# Altium PCB linkit-v4-0.3_6layers_smdonly.PcbDoc (part 4 of 5)
Units mil, origin at the board's own origin, x right, y up, seen from the top; angles counter-clockwise.
Board outline 2755.93 x 1377.98 mil, 6 copper layers (Top Layer, Int1 (GND), Int2 (Sign), Int3 (Sign), Int4 (PWR), Bottom Layer), stack 64.425 mil thick; 199 components, 156 nets, 686 pads, 678 vias.
Unrouted connection lines stored in the file: 1.
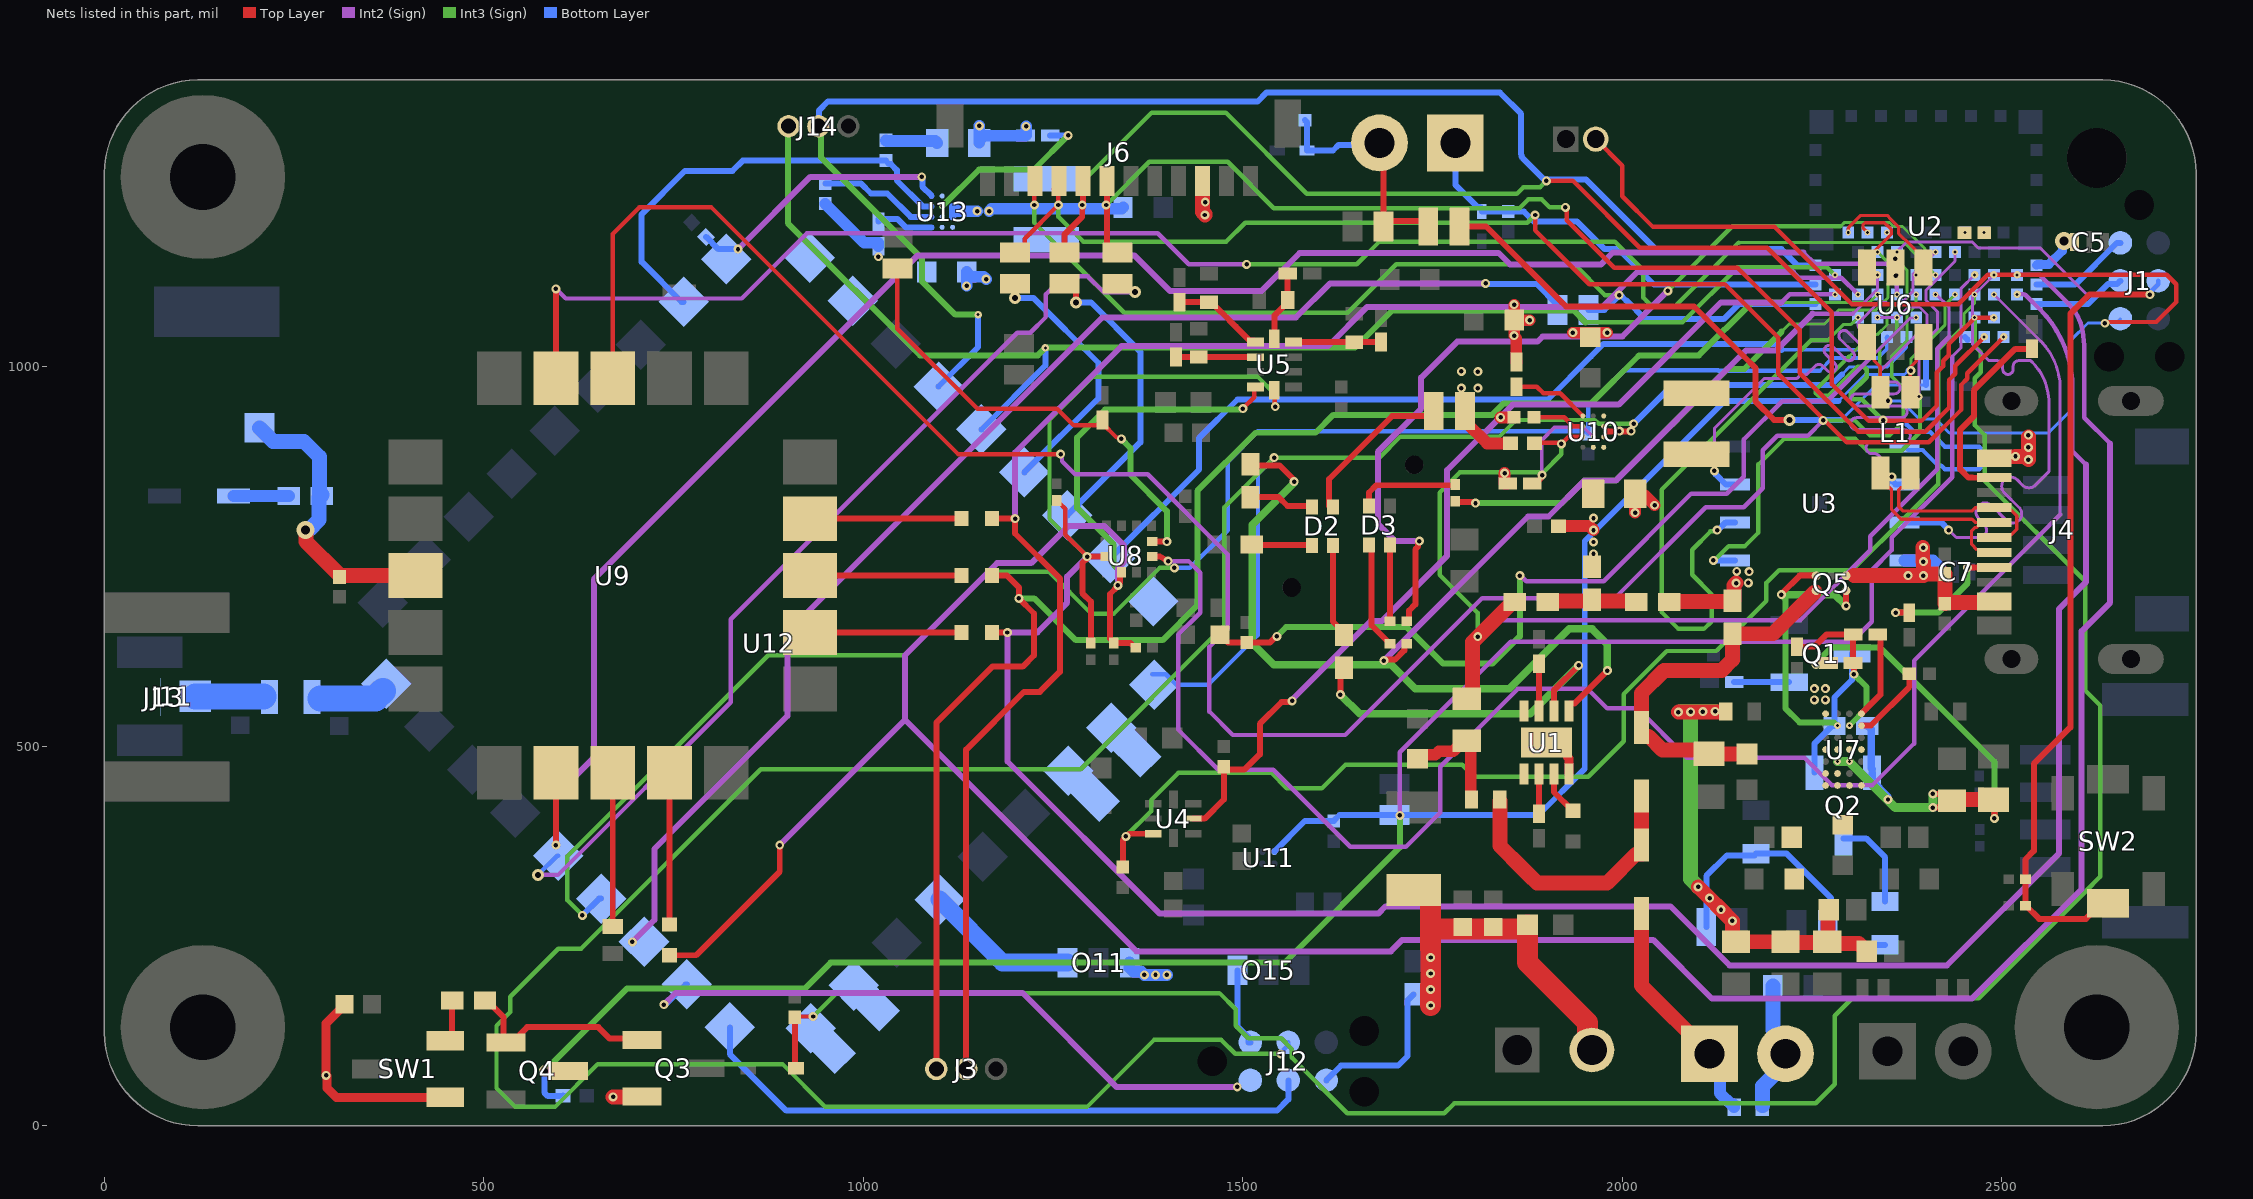
[diagram p7: the nets of this part, all layers, seen from the top]

## Via types
v1: diameter 11.81, hole 5.91, Int1 (GND) to Int3 (Sign), tented both sides, 151 vias
v2: diameter 11.81, hole 5.91, Top Layer to Int1 (GND), tented both sides, 100 vias
v3: diameter 11.81, hole 5.91, Top Layer to Int3 (Sign), tented both sides, 63 vias
v4: diameter 11.81, hole 5.91, Top Layer to Int4 (PWR), tented both sides, 61 vias
v5: diameter 11.81, hole 5.91, Int1 (GND) to Bottom Layer, tented both sides, 58 vias
v6: diameter 11.81, hole 5.91, Int1 (GND) to Int2 (Sign), tented both sides, 38 vias
v7: diameter 15.75/15.75/15.75/15.75 (per signal layer), hole 7.87, Top Layer to Bottom Layer, tented both sides, 28 vias
v8: diameter 11.81, hole 5.91, Top Layer to Int2 (Sign), tented both sides, 18 vias
v9: diameter 11.81, hole 5.91, Int3 (Sign) to Bottom Layer, tented both sides, 17 vias
v10: diameter 11.81, hole 5.91, Int2 (Sign) to Int3 (Sign), tented both sides, 16 vias
v11: diameter 11.81, hole 5.91, Int2 (Sign) to Bottom Layer, tented both sides, 15 vias
v12: diameter 7.87, hole 3.94, Int3 (Sign) to Bottom Layer, tented both sides, 14 vias
v13: diameter 23.62, hole 5.91, Int1 (GND) to Bottom Layer, tented both sides, 13 vias
v14: diameter 19.68, hole 7.87, Top Layer to Bottom Layer, tented both sides, 12 vias
v15: diameter 7.87, hole 3.94, Int2 (Sign) to Bottom Layer, tented both sides, 11 vias
v16: diameter 11.81, hole 5.91, Int4 (PWR) to Bottom Layer, tented both sides, 9 vias
v17: diameter 15.75, hole 7.87, Top Layer to Bottom Layer, tented both sides, 7 vias
v18: diameter 8.9, hole 3.94, Top Layer to Int3 (Sign), tented both sides, 6 vias
v19: diameter 9.84, hole 3.94, Int3 (Sign) to Bottom Layer, tented both sides, 5 vias
v20: diameter 9.84, hole 3.94, Int2 (Sign) to Bottom Layer, tented both sides, 5 vias
v21: diameter 9.84, hole 3.94, Top Layer to Bottom Layer, tented both sides, 5 vias
v22: diameter 11.81, hole 5.91, Bottom Layer to Int4 (PWR), tented both sides, 4 vias
v23: diameter 7.87, hole 3.94, Top Layer to Bottom Layer, tented both sides, 3 vias
v24: diameter 23.62, hole 11.81, Top Layer to Bottom Layer, tented both sides, 3 vias
v25: diameter 23.62, hole 5.91, Top Layer to Int2 (Sign), tented both sides, 2 vias
v26: diameter 23.62, hole 5.91, Int3 (Sign) to Bottom Layer, tented both sides, 2 vias
v27: diameter 11.81, hole 5.91, Top Layer to Bottom Layer, tented both sides, 2 vias
v28: diameter 9.84, hole 3.94, Int1 (GND) to Bottom Layer, tented both sides, 2 vias
v29: diameter 7.87, hole 3.94, Int1 (GND) to Bottom Layer, tented both sides, 2 vias
v30: diameter 15.75, hole 7.87, Int2 (Sign) to Bottom Layer, tented both sides, 1 vias
v31: diameter 15.75, hole 7.87, Top Layer to Int2 (Sign), tented both sides, 1 vias
v32: diameter 6.65, hole 3.94, Int3 (Sign) to Bottom Layer, tented both sides, 1 vias
v33: diameter 23.62, hole 5.91, Bottom Layer to Int4 (PWR), tented both sides, 1 vias
v34: diameter 9.84, hole 3.94, Int2 (Sign) to Int3 (Sign), tented both sides, 1 vias
v35: diameter 6.65, hole 3.94, Top Layer to Int2 (Sign), tented both sides, 1 vias

## Nets (pads, with @x,y where several pads share a name; then routed paths per layer and width w, separated by ;. In a path a pad name is that pad's centre, name@x,y a point inside that pad or via, vN(x,y) a via of type N, cw(c..) or ccw(c..) an arc to the next point about the centre after c; other vN are vias at no path point) (continued)
GPS_INT: U2.61 U9.19 | length 2105.4
  Top Layer w7.87: U9.19@595.2,984.84 v8(595.2,1102.77)
  Int2 (Sign) w5.91: v8(595.2,1102.77) 607.97,1090 840,1090 925.83,1175.83 1387.8,1175.83 1428.63,1135 v10(1505,1135)
  Int3 (Sign) w3.94: 2153.17,1163.72 2371.28,1163.72 2387.2,1147.8 v12(2387.2,1121.01)
  Int3 (Sign) w5.91: v10(1505,1135) 1650,1135 1680,1165 1917.56,1165 1990,1165 2027.81,1127.19 2027.81,1090.85 2034.98,1083.68 2039.49,1079.17 2068.63,1079.17 2111.54,1122.09 2153.17,1163.72
GPS_NRST: U2.53 U9.18 | length 2757.1
  Top Layer w5.75: U9.18@670,984.84 670,1175 705,1210 800,1210 1125,885 v8(1260,885)
  Int2 (Sign) w5.75: v8(1260,885) 1261.91,883.09 1261.91,875.58 1279.14,858.35 1374.79,858.35 1480,753.14 1480,655 1456.04,631.04 1456.04,545.76 1486.88,514.92 1634.92,514.92 1815.35,695.35 1990.35,695.35 2110,815 2160,815 2185,840 2185,890 2204.25,909.25 2244.45,909.25 v10(2264.52,929.32)
  Int3 (Sign) w3.94: 2375.28,1034.23 2375.28,1069.58 2387.2,1081.5 v12(2387.2,1095.42)
  Int3 (Sign) w4.72: v10(2264.52,929.32) 2281.33,929.32 2306.51,929.32 2326.89,908.94 2351.34,908.94 2370.4,928.01 2370.4,971.8 2355,987.2 2355,1013.95 2375.28,1034.23
GPS_PPS: U2.54 U9.7 | length 2450.9
  Top Layer w7.87: v8(595,370) 595,464.96 U9.7@595.2,465.16
  Int2 (Sign) w5.91: 2238.51,1150.72 2253.55,1135.68 2348.24,1135.68 2361.61,1122.31 v15(2361.61,1095.42)
  Int2 (Sign) w7.87: v8(595,370) 595,435 645,485 645,720 1071.85,1146.85 1357.08,1146.85 1403.93,1100 1525,1100 1575,1150 1837.03,1150 1852.03,1135 1917.56,1135 1972.03,1135 1987.75,1150.72 2238.51,1150.72
GPS_PWR_EN: R21.2 U2.50 U4.7 | length 1700.2
  Top Layer w7.87: R21.2@1341.69,341.02 1341.94,341.27 1341.94,376.26 1346.02,380.34 v3(1346.02,381.4) 1347.09,381.4 1350.56,384.87 1381.73,384.87 U4.7@1381.85,385
  Int3 (Sign) w3.94: 2415.92,1020.76 2450.2,1055.04 2450.2,1069.87 2463.98,1083.65 v12(2463.98,1095.42)
  Int3 (Sign) w5.91: v3(1346.02,381.4) 1379.16,414.54 1379.16,429.16 1415,465 1538.11,465 1558.11,445 1604.34,445 1635.32,475.98 1789.02,475.98 1805,460 1955,460 2001.8,506.8 2001.8,568.89 2058.54,625.63 2123.69,625.63 2189.92,691.85 2189.92,715.48 2206.67,732.24 2302.9,732.24 2375.83,805.16 2415.92,845.26 2415.92,1013.57 2415.92,1020.76
GPS_UART_RX: J3.2 R40.2 U2.56 | length 2151.3
  Top Layer w7.87: J3.2@1135.63,75 1135.63,495.63 1211.76,571.76 1232.66,571.76 1258.96,598.06 1258.96,721.38 1200,780.34 v8(1200,800) R40.2@1169.82,800
  Int2 (Sign) w5.91: 2225,1125 2232.59,1117.41 2288.45,1117.41 v15(2310.43,1095.42)
  Int2 (Sign) w7.87: v8(1200,800) 1200,887.11 1340.22,1027.33 1612.33,1027.33 1663.97,1078.97 1917.56,1078.97 1973.97,1078.97 2020,1125 2225,1125
GPS_UART_TX: J3.3 R42.2 U2.55 | length 2192
  Top Layer w7.87: J3.3@1096.26,75 1096.26,531.26 1170,605 1210,605 1225,620 1225,675 v3(1205,695) 1205,709.51 1189.51,725 R42.2@1169.82,725
  Int3 (Sign) w3.94: 2210,1084.6 2325.2,1084.6 v12(2336.02,1095.42)
  Int3 (Sign) w7.87: v3(1205,695) 1225.1,695 1280.17,639.93 1394.35,639.93 1440.15,685.73 1440.15,836.6 1516.7,913.14 1595.85,913.14 1619.41,936.7 1828.67,936.7 1843.78,951.81 1958.84,951.81 2020.6,1013.57 2022.03,1015 2100.92,1015 2170.52,1084.6 2210,1084.6
I2C_SCL: R1.1 R43.2 R54.1 U2.29 U5.10 U8.12 | length 3516.7
  Top Layer w5.91: R54.1@1255,823.98 1255,823.19 1258.35,819.84 1259.13,819.84 1266.04,812.94 1266.04,778.96 v3(1295,750) ; U8.12@1319.41,750.08 U8.12@1319.49,750.16 ; U5.10@1541.69,969.21 1542.24,968.66 1542.24,948.16 v3(1542.79,947.61)
  Top Layer w7.87: R43.2@1169.82,650.19 1169.92,650.1 1189.9,650.1 v8(1190,650) ; v3(1295,750) 1295,747.87 1288.72,741.59 1288.72,701.9 1300,690.62 R1.1@1300,636.02 ; v3@1295.08,750.08 U8.12@1319.41,750.08
  Int2 (Sign) w5.91: v20(2520.08,1095.42) 2527.95,1095.42 cw(c2527.95,1089.52) 2532.13,1093.69 2550.92,1074.9 ; 2550.94,1074.88 cw(c2448.87,973.52) 2591.77,990 cw(c2448.87,973.52) 2592.72,973.55 2592.72,973.49 2592.72,889.09 2610.75,871.05
  Int2 (Sign) w7.87: v3(1295,750) 1268.64,723.64 1268.64,689.35 1229.29,650 v8(1190,650) 1190,480 1390,280 1678.89,280 1687.89,289 2063.75,289 2141.47,211.29 2427.59,211.29 2575.43,359.12 2575.43,681.04 2610.75,716.37 2610.75,871.05
  Int3 (Sign) w5.91: v3(1295,750) 1245.38,799.62 1245.38,930.38 1302.17,987.17 1519.37,987.17 1542.19,964.35 1542.19,948.22 v3(1542.79,947.61)
I2C_SDA: R2.1 R44.1 R56.1 U2.27 U5.9 U8.2 | length 4253
  Top Layer w5.91: v3(1500,945) 1515,960 1515,970.59 1516.58,972.16 U5.9@1516.58,973.54
  Top Layer w7.87: R44.1@744.8,224.82 779.82,224.82 890,335 v8(890,370) ; R2.1@1330,636.02 1330,636.81 1325.04,641.77 1325.04,658.86 1325.04,700.77 1335.32,711.05 1335.32,713.18 1338.19,716.05 1338.19,727.52 U8.2@1340.16,729.49 ; R2.1@1330.23,636.25 1351.94,636.25 1358.19,630 R56.1@1358.98,630
  Int2 (Sign) w5.91: v20(2520.08,1121.01) 2550,1121.01 2586.96,1084.05 cw(c2536.63,1033.73) 2607.81,1033.73 cw(c2508.62,1020.97) 2608.59,1023.31 cw(c2602.69,1023.2) 2608.6,1023.2 2608.6,1014.98 2608.62,990 2608.62,933.08 2642.64,899.06
  Int2 (Sign) w7.87: v8(890,370) 1055,535 ; v3(1335.32,712.11) 1335.32,734.36 1343.85,742.9 1343.85,764.08 1317.93,790 1270,790 1221.25,741.25 1176.25,741.25 1055,620 1055,535 ; 2642.64,899.06 2642.64,689.32 2605,651.68 2605,497.04 2605,312.03 2460.53,167.56 2118.12,167.56 2040.68,245 1710,245 1695,230 1360,230 1055,535
  Int3 (Sign) w7.87: v3(1335.32,712.11) 1335.32,733.99 1330,739.31 1330,766.18 1281.88,814.3 1281.88,906.88 1318.72,943.72 1498.72,943.72 v3(1500,945)
IMU_PWR: R18.2 R31.1 U2.41 | length 1220.7
  Top Layer w7.87: R31.1@1470,647.28 1480.67,636.61 1511.62,636.61 1535.55,636.61 1543.93,645 v3(1545,645)
  Int2 (Sign) w3.94: 2328.71,1013.57 2379.67,1064.53 2386.83,1064.53 v15(2387.2,1064.91)
  Int2 (Sign) w5.91: v10(1865,725) 1865.86,725 1873.38,717.48 1975.36,717.48 2090.55,832.67 2137.67,832.67 2160,855 2160,904.33 2210.51,954.84 2269.98,954.84 2328.71,1013.57
  Int3 (Sign) w7.87: v3(1545,645) 1556.97,656.97 1716.06,656.97 1764.01,609.01 1829.01,609.01 1865,645 v10(1865,725)
INT1_IMU: U2.49 U8.5 | length 2224.1
  Top Layer w7.87: U8.5@1380.51,750.16 1390.61,750.16 v8(1401.53,744.14)
  Int2 (Sign) w3.94: v15(2489.57,1095.42) 2551.05,1033.94 cw(c2488.98,971.8) 2574.9,990 cw(c2488.98,971.8) 2576.81,971.82 2576.81,971.75 2576.81,805.44
  Int2 (Sign) w5.91: v8(1401.53,744.14) 1428.49,744.14 1444.01,728.62 1444.01,676.15 1414.72,646.85 1414.72,522.17 1467.8,469.09 1540.21,469.09 1641.54,367.76 1715,367.76 1760,412.76 1760,473.34 1862.24,575.58 1954.3,575.58 1979.89,550 2020,550 2085,485 2240,485 2276.02,448.98 2329.53,448.98 2384.28,503.73 2384.28,612.92 2576.81,805.44
INT2_IMU: O10.2 R63.1 U8.6 | length 624.1
  Top Layer w5.91: O10.2@1045,1129.5 1045,1050 1150,945 1255,945 1277.29,922.71 1310.08,922.71 1315,927.63 R63.1@1315,930 1315,925.57 1333.69,906.88 1338.12,906.88 v3(1340,905)
  Top Layer w7.87: U8.6@1380.51,769.84 v3(1400,769.84)
  Int3 (Sign) w7.87: v3(1340,905) 1352.04,892.96 1352.04,857.83 1400,809.87 v3(1400,769.84)
KIM_PWR_ON: U2.36 | length 5.4
  Bottom Layer w7.87: U2.36@2451.18,1039.32 U2.36@2455,1035.5
LED_B: R24.1 U2.63 | length 914.5
  Top Layer w7.87: v8(1685.83,612.96) 1687.34,614.46 1700.74,614.46 1712.87,626.59 1712.87,632.64 1715.24,635 R24.1@1716.02,635
  Int2 (Sign) w3.94: 2303.78,1070 2336.02,1102.25 v20(2336.02,1121.01)
  Int2 (Sign) w5.91: 2250.79,1070 2303.78,1070
  Int2 (Sign) w7.87: v8(1685.83,612.96) 1875.68,802.81 1902.81,802.81 1950,850 1991.34,850 2154.92,1013.57 2163.12,1021.78 2202.57,1021.78 2250.79,1070
LED_G: R25.1 U2.60 | length 1195.6
  Top Layer w7.87: R25.1@1716.02,665 1716.81,665 1719.17,667.36 1719.17,678.9 1727.32,687.05 1727.32,759.58 1731.07,763.33 1731.07,768.76 v8(1732.58,770.27)
  Int2 (Sign) w7.87: v8(1732.58,770.27) 1700.92,770.27 1678.02,793.16 1678.02,888.02 1735,945 1735,985.66 1782.53,1033.19 1888.19,1033.19 1895,1040 1917.56,1040 2000,1040 v10(2060,1100)
  Int3 (Sign) w3.94: 2287.37,1185 2292.32,1189.95 2352.69,1189.95 2357.64,1185 2369.1,1185 2398.66,1155.44 2398.66,1135.15 v12(2412.79,1121.01)
  Int3 (Sign) w5.91: v10(2060,1100) 2145,1185 2287.37,1185
LED_R: R23.1 U2.62 | length 717.8
  Top Layer w7.87: R23.1@1780,822.95 1781.2,821.75 1805.38,821.75 v3(1806.58,820.55)
  Int3 (Sign) w3.94: 2210,1046.41 2219.84,1056.26 2266.26,1056.26 2285,1075 2334,1075 2350.07,1091.08 2350.07,1109.47 v12(2361.61,1121.01)
  Int3 (Sign) w7.87: v3(1806.58,820.55) 1920.55,820.55 1950.34,850.34 1991.73,850.34 2138.79,997.4 2160.98,997.4 2210,1046.41
"LX1_TPS63901 3V3&2V31": L2.1 U10.A1
"LX1_TPS63901 3V3&2V32": L4.1 U13.A1
"LX2_TPS63901 3V3&2V31": L2.2 U10.D1
"LX2_TPS63901 3V3&2V32": L4.2 U13.D1
NetBT1_+: BT1.+ C40.2 R41.1 U9.3 | length 381.3
  Top Layer w19.68: v24(265,785) 265.75,784.25 265.75,769.98 C40.2@310,725.74 ; C40.2@312.01,725 U9.3@410.16,725
  Bottom Layer w19.68: BT1.+@204.54,919.68 222.32,901.9 263.1,901.9 283.51,881.49 283.51,831.65 283.72,831.44 R41.1@286.84,831.44 ; v24(265,785) 265.75,785.75 270.37,785.75 283.12,798.5 283.12,827.72 285.09,829.68 R41.1@286.58,829.68
NetC2_2: C2.2 R53.1 U1.8 | length 157.1
  Top Layer w15.75: R53.1@1855.39,690 R53.1@1858.35,690
  Top Layer w19.68: C2.2@1795,562.56 1797.94,562.56 1802.86,567.48 1802.86,637.47 R53.1@1855.39,690
NetC5_2: C5.2 U2.26 | length 55.7
  Bottom Layer w11.81: U2.26@2545.67,1133.81 2546.67,1134.81 2561.85,1134.81 2579.88,1152.84 2579.88,1163.23 v24(2582.14,1165.49)
NetC7_2: C7.2 U3.8 | length 56.9
  Bottom Layer w15.75: U3.8@2371.81,745 2409.12,745 2418.35,735.78 2418.35,731.97 C7.2@2420.32,730
NetC14_1: C14.1 R27.2 U5.4 | length 115
  Top Layer w7.87: U5.4@1566.81,1032.6 C14.1@1646.81,1032.6 R27.2@1681.81,1032.6
NetC15_1: C15.1 R30.2 U5.5 | length 97.4
  Top Layer w7.87: U5.5@1541.69,1036.93 1541.69,1067.44 1559.21,1084.96 C15.1@1559.21,1087.91 1559.21,1118.97 1556.65,1118.97 R30.2@1560.59,1122.91
NetC16_1: C16.1 R32.2 U5.6 | length 121.5
  Top Layer w7.87: R32.2@1416.81,1085.15 C16.1@1455.39,1085.15 1458.35,1085.15 1472.25,1071.24 1472.55,1071.24 1490.87,1052.92 1509.19,1034.57 1514.61,1034.57 U5.6@1516.58,1032.6
NetC23_1: C23.1 C24.2 C25.1 C28.2 C29.1 C32.2 C33.2 C43.2 U7.B3 U7.B4 | length 651.9
  Top Layer w15.75: v3(2122.25,546.14) 2135.91,546.14 C25.1@2136.3,545.75
  Top Layer w19.68: v3(2073.87,545.07) 2133.35,545.07 C25.1@2134.38,546.11 ; v3(2100,315) v3(2115,300) v3(2130,285) v3(2145,270) 2145,253.82 2146.34,252.48 2146.34,242.48 2146.42,242.56 C43.2@2150,242.56 C24.2@2215,242.56 C24.2@2218.74,242.56 ; C24.2@2219.67,241.63 C28.2@2255.93,241.63 ; C28.2@2270.95,242.56 2270.95,280.64 2271.89,281.59 C32.2@2271.89,285 ; C28.2@2273.27,240.42 2311.47,240.42 2317.56,234.33 2318.15,234.33 2321.89,230.59 C33.2@2321.89,230
  Int3 (Sign) w19.68: v3@2077.64,546.14 v3@2090.71,546.14 ; v3(2100,315) 2090,325 v3(2090,545.43) v3@2090.71,546.14 ; v3(2122.25,546.14) v3@2090.71,546.14
  other v3: 2106.13,545.78
NetC30_1: C30.1 C31.1 R36.1 U7.C2 U7.C3 | length 707.5
  Top Layer w7.87: v3(2254.96,607.51) 2255.72,608.27 2269.8,608.27 R36.1@2271.54,610 ; v3(2409.26,419.39) 2425.06,419.39 C31.1@2435.43,429.77 ; v3(2409.26,437.48) 2425.36,437.48 C31.1@2434.25,428.59 ; v3(2490,405) C30.1@2490,429.02
  Top Layer w19.68: C31.1@2435.43,429.77 C30.1@2489.25,429.77 C30.1@2490,429.02
  Int3 (Sign) w7.87: v3(2254.96,607.51) 2254.96,608.58 2256.93,610.55 2256.93,611.93 2275,630 2340,630 2490,480 v3(2490,405)
  Int3 (Sign) w11.81: v18(2283.5,480) v18(2299.25,480) 2359.86,419.39 v3(2409.26,419.39) v3(2409.26,437.48)
NetC49_2: C49.2 J11.3 J13.1 L3.2 | length 89.4
  Bottom Layer w34.26: J11.3@120.55,565.51 L3.2@210,565.51
NetC57_1: C57.1 R51.2 U5.7 | length 110.1
  Top Layer w7.87: R51.2@1411.97,1012.91 C57.1@1441.97,1012.91 U5.7@1516.58,1012.91 U5.7@1516.5,1012.99 ; C57.1@1441.97,1016.81 C57.1@1445.79,1012.99
NetC58_1: C58.1 D5.1 D6.1 U1.1 | length 357.6
  Top Layer w19.68: C58.1@1838.7,428.03 1838.7,369.06 1868.57,339.19 1868.57,338.99 1882.41,325.15 1882.61,325.15 1887.76,320 1980,320 2018.46,358.46 2025,358.46 2025,365 D6.1@2025,434.45
NetD2_1: D2.1 O9.2 | length 216
  Top Layer w7.87: D2.1@1618.78,815.59 1617.88,816.49 1613.78,816.49 1613.78,852.24 1696.54,935 1744.89,935 O9.2@1751.63,941.73
NetD2_2: D2.2 R13.1 | length 86.5
  Top Layer w7.87: R13.1@1510,828.35 1547.16,828.35 1558.9,816.61 1590.2,816.61 D2.2@1591.22,815.59
NetD2_3: D2.3 R14.2 | length 80.2
  Top Layer w7.87: R14.2@1511.65,766.02 1512.24,765.43 1590.2,765.43 D2.3@1591.22,764.41
NetD2_4: D2.4 R15.1 | length 123.9
  Top Layer w7.87: D2.4@1618.78,764.41 1618.78,664.37 1633.54,649.61 R15.1@1633.54,646.65
NetD3_2: D3.2 R23.2 | length 136
  Top Layer w7.87: D3.2@1666.22,816.61 1666.22,834.48 1675.72,843.98 1778.98,843.98 R23.2@1780,845
NetD3_3: D3.3 R24.2 | length 142.4
  Top Layer w7.87: D3.3@1666.22,765.43 1669.64,762.01 1669.64,659.33 1690.83,638.15 1690.83,637.36 1693.19,635 R24.2@1693.98,635
NetD3_4: D3.4 R25.2 | length 100.2
  Top Layer w7.87: R25.2@1693.98,665 D3.4@1693.98,765.24
NetD4_1: D4.1 R41.2 | length 73.1
  Bottom Layer w15.75: D4.1@170.2,829.68 R41.2@243.27,829.68
NetJ4_A5: J4.A5 R34.2 | length 184.8
  Top Layer w7.87: v3(2360,676.22) R34.2@2377.99,676.22 ; v3(2455,735.87) J4.A5@2489.88,735.87
  Int3 (Sign) w7.87: v3(2360,676.22) 2416.22,676.22 2455,715 v3(2455,735.87)
NetJ4_B5: J4.B5 R33.2 | length 260.6
  Top Layer w7.56: 2461.31,853.98 J4.B5@2473.15,853.98
  Top Layer w7.87: 2461.31,853.98 2456.02,853.98 2445,865 2445,916.95 2463.15,935.1 2463.15,969.08 2517.85,1023.78 R33.2@2540,1023.78 ; J4.B5@2473.15,853.98 J4.B5@2489.88,853.98
NetJ12_1: J12.1 O15.1 | length 103.5
  Bottom Layer w7.87: O15.1@1493,205 1493,131.61 1507.5,117.11 1507.5,110 J12.1@1510,110
NetJ12_6: J12.6 R65.2 | length 204.9
  Bottom Layer w7.87: J12.6@1610,60 1629.43,79.43 1704.43,79.43 1717.13,92.13 1717.13,165.47 R65.2@1725,173.35
NetO11_1: O11.1 U12.30 | length 202.8
  Bottom Layer w23.62: U12.30@1100.58,298.1 1183.67,215 O11.1@1269,215
NetQ1_1: Q1.1 R3.1 | length 72.4
  Bottom Layer w7.87: R3.1@2147.4,584.49 Q1.1@2219.84,584.49
NetQ1_3: Q1.3 Q2.1 R4.2 | length 178.8
  Bottom Layer w7.87: Q2.1@2253.39,465.39 2253.39,503.9 2276.57,527.09 R4.2@2279.53,527.09 2279.53,564.53 2302.52,587.52 Q1.3@2302.52,622.09
NetQ2_3: Q2.3 R5.1 | length 123.5
  Bottom Layer w7.87: Q2.3@2291.18,378.78 2321.22,378.78 2346.18,353.82 R5.1@2346.18,295.63
NetQ3_1: Q3.1 Q4.1 R49.1 | length 265.9
  Top Layer w7.87: R49.1@501.65,165 504.61,165 526.39,143.21 526.39,112.61 Q4.1@529.17,109.84 537.34,109.84 556.79,129.29 556.79,130 651.06,130 666.06,115 701.06,115 Q3.1@708.66,107.4
NetQ5_A2: Q5.A2 Q5.C1 U7.F3 | length 397.9
  Top Layer w7.87: v3(2209.68,699.87) 2209.68,700.96 2233.56,724.84 Q5.C1@2255.32,724.84 ; v3(2294.69,685) Q5.A2@2294.69,705.16
  Int3 (Sign) w7.87: v3(2209.68,699.87) 2209.68,698.8 2214.8,693.68 2214.8,550.2 2233.6,531.4 2279.07,531.4 2283.23,527.24 v18(2283.5,527.24)
  Int3 (Sign) w10: v3(2209.68,699.87) 2279.82,699.87 v3(2294.69,685)
NetR10_2: R10.2 U1.3 | length 59.2
  Top Layer w7.87: U1.3@1909.84,463.66 1909.84,439.84 1934.51,415.18 R10.2@1935,415.18
NetR11_2: R11.2 U1.2 | length 52.4
  Top Layer w7.87: R11.2@1890.16,411.22 U1.2@1890.16,463.66
NetR12_2: R12.2 U1.7 | length 62.5
  Top Layer w7.87: R12.2@1890,608.78 1890.08,608.7 1890.08,546.42 U1.7@1890.16,546.34
NetR17_1: R17.1 U2.20
  other v21: 2451.18,1177.12
NetR17_2: R17.2 U2.22
  other v21: 2476.77,1177.12
NetR36_2: R36.2 R38.1 R39.1 U7.F2 | length 217.3
  Top Layer w7.87: R39.1@2230,631.22 2252.87,631.22 2268.89,647.24 R38.1@2304.13,647.24 R36.2@2304.13,610.16 ; R36.2@2303.98,610 2305,608.98 v3(2305,595)
  Int3 (Sign) w7.87: v18(2299.25,527.24) 2299.25,527.52 2321.7,549.97 2321.7,578.3 v3(2305,595)
NetR37_1: R37.1 U7.F1 | length 101.8
  Top Layer w7.87: U7.F1@2315,527.24 2315.2,527.44 2327.44,527.44 2377.99,577.99 R37.1@2377.99,595.75
NetR38_2: R38.2 U7.G1 | length 116
  Top Layer w7.87: U7.G1@2315,542.99 2340,567.99 2340,643.82 R38.2@2336.57,647.24
NetR40_1: R40.1 U9.14 | length 199.7
  Top Layer w7.87: U9.14@929.84,799.8 930.04,800 R40.1@1129.47,800
NetR42_1: R42.1 U9.13 | length 199.6
  Top Layer w7.87: U9.13@929.84,725 R42.1@1129.47,725
NetR43_1: R43.1 U9.12 | length 199.6
  Top Layer w7.87: U9.12@929.84,650.2 R43.1@1129.47,650.19
NetR44_2: R44.2 U9.9 | length 200
  Top Layer w7.87: R44.2@744.8,265.18 U9.9@744.8,465.16
NetR45_1: R45.1 U10.B2 | length 145
  Top Layer w7.87: R45.1@1881.37,846.38 1885.8,846.38 1893.65,854.22 1893.65,856.71 v8(1894.4,857.46)
  Int2 (Sign) w3.94: 1949.31,920.19 v35(1961.73,907.76)
  Int2 (Sign) w4.72: v8(1894.4,857.46) 1894.09,857.77 1894.09,903.65 1910.63,920.19 1949.31,920.19
NetR46_1: R46.1 U10.C3 | length 68.8
  Top Layer w5.91: R46.1@1883.86,933.42 1923.51,933.42 1935.51,921.41 U10.C3@1947.67,921.41
NetR47_2: R47.2 U10.D3 | length 103.1
  Top Layer w5.91: R47.2@1860.87,973.91 1887.31,973.91 1896.14,965.08 1903.95,965.08 1904.03,965 1918.27,965 U10.D3@1947.95,935.32
NetR49_2: R49.2 SW1.2 | length 56.5
  Top Layer w7.87: SW1.2@449.21,112.4 449.49,112.4 458.35,121.26 R49.2@458.35,165
NetR52_1: R52.1 R53.2 R55.1 | length 119.5
  Top Layer w15.75: R53.2@1901.65,690 R53.2@1903.33,691.67 ; R55.1@1958.33,691.67 R55.1@1960,693.35 R55.1@1961.67,691.67 ; R52.1@2016.67,691.67 R52.1@2018.35,690
  Top Layer w19.68: R53.2@1903.33,691.67 R55.1@1958.33,691.67 ; R55.1@1961.67,691.67 R52.1@2016.67,691.67
NetR68_1: R68.1 U13.B2 | length 228.6
  Int3 (Sign) w7.87: v32(1103.99,1211.36) 1152.63,1260 1225,1260 v9(1270,1305)
  Bottom Layer w7.87: R68.1@1246.22,1305 v9(1270,1305)
NetR69_1: R69.1 U13.C3 | length 158.5
  Bottom Layer w7.87: R69.1@950,1241.77 996.84,1241.77 1010.22,1228.39 1031.61,1228.39 1062.42,1197.58 U13.C3@1090.21,1197.58
NetR70_2: R70.2 U13.D3 | length 78.6
  Bottom Layer w7.87: R70.2@1020,1191.22 1020,1195 1045.01,1195 1056.22,1183.8 U13.D3@1090.21,1183.8
NPG_LED: R15.2 U1.6 | length 461.8
  Top Layer w7.87: v3(1628.52,568.27) 1628.52,598.33 R15.2@1633.54,603.35 ; U1.6@1909.84,546.34 1909.84,574.04 v3(1942.38,606.58)
  Int3 (Sign) w10: v3(1628.52,568.27) 1654.06,542.74 1878.54,542.74 v3(1942.38,606.58)
nRESET: C6.2 J1.3 R16.1 SW2.2 U2.13 | length 1433.8
  Top Layer w7.87: C6.2@2531.02,290 R16.1@2531.02,325 2531.02,351.02 2542.24,362.24 2542.24,477.24 2590.12,525.12 2590.12,1069.97 2615.15,1095 v27(2695,1095) ; C6.2@2531.81,290 2549.07,272.74 2610.57,272.74 2631.14,293.31 SW2.2@2640,293.31
  Int2 (Sign) w3.94: v15(2361.61,1151.53) 2374.36,1164.27 2461.34,1164.27 2469.01,1156.61 2550.63,1156.61 2612.24,1095 v27(2695,1095)
  Bottom Layer w5.91: v27(2695,1095) 2695,1097.66 2706.14,1108.8 J1.3@2706.14,1113.24
nRESET-SAT: J12.3 U2.42 U12.35 | length 3999
  Int3 (Sign) w5.77: v9(1550,95) 1490.02,95 1471.72,113.3 1383.11,113.3 1294.81,25 950,25 893.57,81.43 650.38,81.43 593.95,25 541.47,25 516.93,49.55 516.93,131.93 535,150 535,170 598.3,233.3 628.3,233.3 865,470 1286.43,470 1475.69,659.27 1475.69,814.81 v9(1541.19,880.31) 1680.13,880.31 1707.91,908.09 1838.09,908.09 1860,930 1963.92,930 1968.92,925 v9(2015,925)
  Bottom Layer w3.94: 2289.34,990 2299.3,999.96 2349.18,999.96 2374.41,1025.18 U2.42@2374.41,1039.32
  Bottom Layer w5.77: U12.35@1380.83,595.06 1398.63,595.06 1412.75,580.94 1413.2,581.39 1454.79,581.39 1520,646.6 1520,859.12 v9(1541.19,880.31) ; v9(1550,95) 1550,96.64 1560,106.64 J12.3@1560,110
  Bottom Layer w7.87: v9(2015,925) 2066.26,976.26 2275.61,976.26 2289.34,990
NRF_DBG: J1.6 J2.2 U2.43 | length 1593.2
  Top Layer w5.75: J2.2@1965,1300 2000,1265 2000,1224.8 2040.46,1184.34 2200.66,1184.34 2302.57,1082.43 2442.43,1082.43 2481.31,1121.31 2717.29,1121.31 2729.71,1108.89 2729.71,1085.32 2703.43,1059.04 2637.32,1059.04 v27(2635.7,1057.42)
  Int3 (Sign) w4.72: v9(2350,955) 2339.05,965.95 2339.05,1023.71 2361.61,1046.27 v12(2361.61,1064.91)
  Bottom Layer w3.94: v9(2350,955) 2366.63,955 2375.13,946.5 2375.88,946.5 2390.89,931.5 2412.12,931.5 2430.81,912.81 2561.06,912.81 2590,941.75 2590,1034.46 2613.4,1057.86 2635.26,1057.86 v27(2635.7,1057.42) 2637.96,1059.68 2652.57,1059.68 J1.6@2656.14,1063.24
PGND1: C41.2 C42.2 C48.2 C50.2 FB3.1 FB4.1 R45.2 R46.2 R47.1 R68.2 R69.2 R70.1 U10.B1 U10.C1 U13.B1 U13.C1 | length 739.5
  Top Layer w3.94: U10.B1@1975.51,907.76 1981.91,914.16 ; U10.C1@1975.51,921.54 1976.98,921.54 1981.91,916.6
  Top Layer w7.87: 1981.91,915.07 v2@2011.7,915.07
  Top Layer w15.15: FB4.1@1857.44,1057.87 1857.44,1041.07 1860.57,1037.94 1860.57,1006.65 R47.1@1860.87,1006.35 ; FB4.1@1857.44,1065.34 v2(1857.44,1081.99) ; FB4.1@1861.18,1061.61 v2(1877.82,1061.61) ; v2(1935,1045) v2(1980,1045)
  Top Layer w15.75: v2(1839.7,933.42) R46.2@1857.09,933.42 ; v2(1845,860) 1845,846.38 R45.2@1848.93,846.38 ; v2(2016.92,807.78) C41.2@2016.92,832.79 2018.31,831.4 2028.84,831.4 v2(2042.59,817.64)
  Bottom Layer w9.09: U13.C1@1117.77,1197.58 1117.77,1201.37 ; U13.B1@1117.77,1211.36 1120.8,1208.33
  Bottom Layer w10.12: 1117.77,1201.37 1120.8,1204.4
  Bottom Layer w15.15: R69.2@950,1215 950,1214.61 1001.1,1163.51 1019.7,1163.51 1020,1163.21 R70.1@1020,1158.78 ; 1120.8,1204.4 1120.8,1208.33 1124.13,1205 v5(1150,1205) ; v5(1136.14,1106.67) 1136.14,1124.57 C50.2@1136.57,1125 1136.57,1124.02 1141.8,1118.79 1158.6,1118.79 v5(1161.98,1115.41) ; C48.2@1152.56,1295 1153.06,1295.5 v5(1153.06,1317.47) ; C48.2@1152.56,1297.51 1159.75,1304.7 1213.48,1304.7 R68.2@1213.78,1305 1214.19,1305.01 1214.48,1305.3 v5(1214.48,1316.61) ; v5(1165.75,1205) 1168.87,1208.12 1340.32,1208.12 FB3.1@1342.2,1210
  other v2: 1996.13,915.18 2011.7,915.18 1857.44,1041.23
  other v5: 1020,1145
PGND3: FB2.1 U7.A1 U7.A2 U7.A3 U7.A4
PGND4: C2.1 C58.2 FB6.1 U1.4 U1.9 | length 216.6
  Top Layer w11.81: U1.9@1900,505 1913.78,505 1927.56,491.22 1927.56,486.27 1929.53,484.3 U1.4@1929.53,463.66
  Top Layer w15.15: FB6.1@1730,483.43 1735.22,488.65 1753.65,488.65 1758.4,493.4 1777.22,493.4 1791.26,507.44 C2.1@1795,507.44 1800.02,502.42 1800.02,431.28 C58.2@1801.3,430
POWER_CONTROL: D1.2 R58.2 U2.35 | length 2881.2
  Top Layer w5.91: R58.2@910,143.23 910.89,144.11 v3(934.11,144.11)
  Top Layer w7.87: R58.2@910,142.83 910,77.48 D1.2@911.5,75.98 D1.2@913.66,75.98
  Int3 (Sign) w5.91: v3(934.11,144.11) 965,175 1469.23,175 1490.67,153.56 1490.67,132.02 1507.38,115.3 1550.58,115.3 1564.76,101.12 1564.76,89.7 1637.83,16.63 1765.52,16.63 1778.89,30 2255,30 2280,55 2280,145.2 2302.97,168.17 2469.36,168.17 2609.76,308.57 2629.63,328.44 2629.63,553.72 2609.76,573.59 2609.76,717.36 2477.19,849.93 2477.19,910.21 2464.13,923.26 2464.13,984.76 2472.38,993.01 2472.38,1019.43 2463.98,1027.84 v12(2463.98,1064.91)
QSPI_CLK: U2.45 U3.6 | length 693.5
  Int2 (Sign) w3.94: v15(2336.02,1064.91) 2363.12,1064.91 2376.99,1078.78 2391.43,1078.78 2401.25,1068.96 2401.25,1055.96 2358.87,1013.57 2340,994.7 2340,990 2340,988.03 ccw(c2347.87,988.03) 2347.87,980.16 2358.19,980.16 cw(c2358.19,972.28) 2358.19,964.41 2308.5,964.41 ccw(c2308.5,956.54) 2308.5,948.66 2367.28,948.66 cw(c2367.28,940.79) 2367.28,932.91 2308.5,932.91 ccw(c2308.5,925.04) 2308.5,917.16 2371.5,917.16 cw(c2371.5,909.29) 2371.5,901.42 2329.05,901.42 ccw(c2329.05,893.54) 2329.05,885.67 2332.13,885.67 cw(c2332.13,877.8) 2340,877.8 2340,870 2345.2,864.8 v11(2355,855)
  Bottom Layer w7.87: v11(2355,855) 2356.06,853.94 2356.06,848.94 2360,845 U3.6@2371.81,845
QSPI_CS: U2.19 U3.1 | length 706.7
  Int2 (Sign) w3.94: v34(2390.64,960.82) 2390.64,1025.43 2415.2,1049.98 2415.2,1072.71 2399.77,1088.13 2399.77,1100.5 2438.39,1139.11 v15(2438.39,1151.53)
  Int3 (Sign) w5.91: v11(2120,745) 2121.33,745 2140.17,763.84 2161.51,763.84 2179.37,781.69 2179.37,871.43 2212.94,905 2307.06,905 2322.91,889.14 2367.28,889.14 2392.15,914.01 2392.15,959.31 v34(2390.64,960.82)
  Bottom Layer w7.87: v11(2120,745) U3.1@2148.19,745
QSPI_IO0: U2.11 U3.5 | length 743.8
  Int3 (Sign) w3.94: 2298.57,1013.57 2327.37,1042.37 2335.71,1042.37 2348.55,1055.21 2348.55,1072.41 2357.45,1081.31 2366.2,1081.31 2374.8,1089.91 2374.8,1127.47 2363.03,1139.23 2348.31,1139.23 v12(2336.02,1151.53)
  Int3 (Sign) w5.91: 2298.57,1013.57 2255.11,970.11 2255.11,965.22 2258.57,961.76 2271.76,961.76 2310,1000 2317.9,1000 2321.87,996.02 2321.87,986.38 2301.14,965.65 2301.14,960.75 2304.6,957.29 2315.45,957.29 v9@2343.05,929.69
  Bottom Layer w5.91: v9(2343.47,929.69) 2368.92,929.69 2383.93,914.68 2405.15,914.68 2424.84,895 2470,895 2478.86,886.14 2478.86,873.86 2470,865 2425,865 2420,870 2415.9,870 2395.49,890.41 2376.4,890.41 U3.5@2371.81,895
QSPI_IO1: U2.47 U3.2 | length 769.4
  Int3 (Sign) w3.94: 2270.6,1035 2291.58,1055.99 2301.51,1055.99 v12(2310.43,1064.91)
  Int3 (Sign) w5.91: v11(2125,785) 2123.12,783.12 2116.09,783.12 2092,759.03 2092,725.89 2117.86,700.02 2117.86,664.96 2107.52,654.62 2073.99,654.62 2051.67,676.93 2051.67,838.08 2227.16,1013.57 2248.59,1035 2270.6,1035
  Bottom Layer w7.87: v11(2125,785) 2126.38,785 2136.38,795 U3.2@2148.19,795
QSPI_IO2: U2.17 U3.3 | length 656.7
  Int2 (Sign) w3.94: v11(2121.42,862.87) 2121.42,919.12 2186.75,984.45 2229.63,984.45 2235.18,990 2243.02,990 2254.15,1001.14 cw(c2259.02,996.26) 2263.9,1001.14 2270.16,994.87 ccw(c2275.03,999.74) 2279.9,994.87 ccw(c2275.03,999.74) 2279.9,1004.62 2267.86,1016.66 cw(c2272.73,1021.53) 2267.86,1026.4 cw(c2272.73,1021.53) 2277.6,1026.4 2294.06,1009.94 ccw(c2298.94,1014.81) 2303.81,1009.94 ccw(c2298.94,1014.81) 2303.81,1019.69 2287.35,1036.15 cw(c2292.22,1041.02) 2287.35,1045.89 cw(c2292.22,1041.02) 2297.09,1045.89 2313.55,1029.43 ccw(c2318.42,1034.3) 2323.29,1029.43 ccw(c2318.42,1034.3) 2323.29,1039.17 2312.61,1049.85 cw(c2317.49,1054.73) 2312.61,1059.6 2337.61,1084.6 ; 2334.89,1081.87 2334.89,1082.29 2337.19,1084.6 2337.61,1084.6 ; v15(2412.79,1151.53) 2382.73,1121.46 2382.73,1099.32 2365.76,1082.35 2350.42,1082.35 2348.18,1084.6 2337.61,1084.6
  Bottom Layer w7.87: v11(2121.42,862.87) 2122.92,861.37 2122.92,858.45 2136.38,845 U3.3@2148.19,845
QSPI_IO3: U2.57 U3.7 | length 729.6
  Int2 (Sign) w3.94: v11(2430,785) 2440,775 2475,775 2476.39,776.39 ccw(c2467.93,784.86) 2476.39,793.32 2469.42,800.29 cw(c2477.88,808.75) 2469.42,817.22 cw(c2477.88,808.75) 2486.35,817.22 2505.79,797.77 ccw(c2514.25,806.24) 2522.71,797.77 ccw(c2514.25,806.24) 2522.71,814.7 2503.27,834.14 cw(c2511.74,842.6) 2503.27,851.07 cw(c2511.74,842.6) 2520.2,851.07 2527.17,844.1 ccw(c2535.63,852.56) 2544.1,844.1 2561.89,861.89 2561.89,956.76 ccw(c2487.11,953.2) 2552.3,990 ccw(c2487.11,953.2) 2543.52,1002.42 2537.92,1008.02 2523.79,1008.02 2521.82,1008.02 ccw(c2521.82,1001.13) 2514.93,1001.13 2514.93,996.89 cw(c2508.04,996.89) 2508.04,990 cw(c2508.04,996.89) 2501.15,996.89 2501.15,1001.13 ccw(c2494.26,1001.13) 2494.26,1008.02 2482.92,1008.02 2476.03,1014.91 2461.23,1029.71 2461.23,1092.67 v20(2489.57,1121.01)
  Bottom Layer w7.87: U3.7@2371.81,795 2420,795 v11(2430,785)
REED_MCU: Q4.3 R7.2 U2.58 | length 2666
  Top Layer w7.87: v17(580.46,72.63) 611.65,72.63 Q4.3@611.84,72.44
  Int2 (Sign) w3.94: 2434.68,1013.57 2446.49,1025.37 2446.49,1103.52 v20(2463.98,1121.01)
  Int2 (Sign) w5.91: v10(1706.9,409.22) 1706.87,409.25 1706.87,492.09 1852.77,637.99 2302.55,637.99 2328.57,664.01 2328.57,732.09 2355.1,758.62 2355.1,775.1 2434.68,854.68 2434.68,1013.57
  Int3 (Sign) w7.87: v17(580.46,72.63) 688.58,180.75 922.9,180.75 957.15,215 1555,215 1706.9,366.9 v10(1706.9,409.22)
  Bottom Layer w7.87: v17@579.94,72.11 579.94,43.73 584.55,39.12 603.37,39.12 R7.2@604.25,40
RX-OUT: C26.1 C27.1 D6.2 Q5.C2 R35.2 U7.D1 U7.D2 U7.D3 U7.D4 | length 512.1
  Top Layer w15.75: Q5.C2@2252.84,702.68 Q5.C2@2255.32,705.16
  Top Layer w19.68: C27.1@2164.25,490 2164.14,490.12 2114.37,490.12 2114.23,490.26 2109.52,494.96 2052.92,494.96 2034.7,513.19 2025,513.19 D6.2@2025,525 2025,570 2055,600 2130.95,600 2145,614.05 R35.2@2145,648.35 2153.03,648.35 2198.5,648.35 Q5.C2@2252.84,702.68
SAFE: R26.2 U9.8 | length 202.4
  Top Layer w7.87: R26.2@670,262.72 U9.8@670,465.16
SAT_EN: O14.2 R20.2 U2.51 U11.B2 | length 1401.2
  Int3 (Sign) w3.94: v9(2380,995) 2380,1010.22 2425.34,1055.56 2425.34,1081.82 2438.39,1094.87 v12(2438.39,1095.42)
  Bottom Layer w3.94: 2284.72,955 2319.61,989.88 2371.79,989.88 v9@2376.91,995
  Bottom Layer w7.87: U11.B2@1541.49,361.22 1582.05,401.77 R20.2@1620,401.77 ; R20.2@1620,402.17 1627.33,409.5 O14.2@1700,409.5 1889.5,409.5 1950.5,470.5 1950.5,770.5 2135,955 2284.72,955 ; v9@2376.91,995 v9(2380,995)
SAT_INT: U2.46 U12.1 | length 1157.2
  Bottom Layer w4.72: 2210,1022.37 2319.85,1022.37 2323.23,1025.75 U2.46@2323.23,1039.32
  Bottom Layer w7.87: U12.1@1325.46,747.75 1442.43,864.73 1442.43,906.38 1493.08,957.03 1902.03,957.03 1958.57,1013.57 1975,1030 2202.37,1030 2210,1022.37
SAT_SPI_MISO: O4.1 U12.2 | length 401.6
  Top Layer w7.87: O4.1@1265,1109.5 1270.94,1109.5 1280,1100.44 v17(1280,1085)
  Bottom Layer w7.87: U12.2@1268.89,804.32 1365,900.43 1365,1020 1300,1085 v17(1280,1085)
SAT_SPI_MOSI: O3.1 U12.22 | length 1268.6
  Top Layer w5.91: O3.1@1335,1109.5 1341.69,1109.5 1351.73,1099.45 1357.08,1099.45 v31(1358.08,1098.46)
  Int2 (Sign) w5.91: v30(571.25,330.56) 597.83,330.56 825.4,558.13 825.4,646.64 825.4,667.47 1202.93,1045 1220,1045 1240.68,1065.68 1240.68,1095.68 1264.06,1119.06 1295.94,1119.06 1316.54,1098.46 v31(1358.08,1098.46)
  Bottom Layer w5.91: v30@571.25,330.56 596.74,356.05 U12.22@598.04,356.05
SAT_SPI_NSS: O1.1 U12.24 | length 1715.7
  Int2 (Sign) w7.87: v11(695.82,242.29) 725,271.47 725,365 900,540 900,650 1315,1065 1570,1065 1615,1110 v11(1820,1110)
  Bottom Layer w7.87: v11(1820,1110) 1820.75,1109.25 1886.94,1109.25 1914.5,1081.69 O1.1@1914.5,1075
SAT_SPI_SCK: O2.1 U12.3 | length 349
  Top Layer w7.87: v17(1199.95,1090.52) O2.1@1200,1109.5 O2.1@1200,1109.5
  Bottom Layer w7.87: v17(1199.95,1090.52) 1224.48,1090.52 1310,1005 1310,958.57 U12.3@1212.32,860.89
SAT_SWCLK: J12.4 U12.26 | length 833.1
  Bottom Layer w7.87: U12.26@824.3,129.78 824.3,94.46 898.76,20 1545,20 1560,35 J12.4@1560,60
SAT_SWDIO: J12.2 U12.25 | length 854.6
  Int2 (Sign) w7.87: v11(737.22,159.63) 752.6,175 1210,175 1333.49,51.51 v11(1492.71,51.51)
  Bottom Layer w7.87: v11(737.22,159.63) 737.98,160.38 739.87,160.38 765.83,186.34 U12.25@767.74,186.34
SAT_UART_RX: J14.2 U2.6 U12.5 | length 1938.3
  Int3 (Sign) w7.87: J14.2@940.97,1316.98 944.46,1313.49 944.46,1275.54 1077.2,1142.8 1077.2,1112.8 1121.33,1068.67 v19(1151.34,1068.67)
  Bottom Layer w7.87: J14.2@941.82,1317.83 941.82,1337.97 953.34,1349.49 1519.49,1349.49 1531.07,1361.07 1838.93,1361.07 1866.76,1333.24 1866.76,1280.17 ccw(c1874.64,1280.2) 1869.05,1274.66 1896.67,1247.04 1951.9,1247.04 2043.94,1155 2209.46,1155 2230.66,1133.81 U2.6@2254.33,1133.81 ; U12.5@1099.18,974.02 1151.34,1026.18 v19(1151.34,1068.67)
SAT_UART_TX: J14.3 U2.5 U12.4 | length 1788.6
  Int3 (Sign) w5.91: 1951.37,1058.63 2079.28,1058.63 2151.99,1131.34 2269.59,1131.34 v12(2279.92,1121.01)
  Int3 (Sign) w7.87: J14.3@901.6,1316.98 900.63,1316.01 900.63,1189.37 1075,1015 1230,1015 v19(1240,1025) ; v19@1240,1025.28 1647.83,1025.28 1696.76,1074.21 1917.56,1074.21 1935.79,1074.21 1951.37,1058.63
  Bottom Layer w7.87: J14.3@900.63,1316.01 J14.3@901.6,1316.98 ; U12.4@1155.75,917.46 1240,1001.7 v19(1240,1025)
SAT_WKUP: R19.2 U2.44 U12.23 | length 2273.7
  Int3 (Sign) w5.91: v11(630.1,277.39) 610,297.49 610,355 875,620 1055,620 1165,730 1245,730 1300,675 1330.31,675 1390.31,735 v9(1410,735)
  Bottom Layer w4.72: 2259.99,995 2276.6,1011.61 2336.47,1011.61 2348.1,1023.24 U2.44@2348.1,1038.6
  Bottom Layer w5.91: v9(1410,735) 1430.3,735 1480,784.7 1480,875 1520,915 1951.77,915 R19.2@1955,911.77 1955,948.07 2002.44,995.51 2126.04,995.51 2126.55,995 2259.99,995 ; U2.44@2348.1,1038.6 U2.44@2348.82,1039.32
  Bottom Layer w7.87: v11(630.1,277.39) 652.19,299.48 U12.23@654.61,299.48
"SEL_TPS63901 3V3&2V32": R66.1 U12.10 U13.B3 | length 584.8
  Bottom Layer w7.87: U12.10@763.26,1085.47 760.82,1085.47 707.96,1138.33 707.96,1200.96 764.96,1257.96 827.6,1257.96 841.25,1271.61 R66.1@1030,1271.61 R66.1@1029.96,1271.26 ; R66.1@1030,1271.61 1030,1271.22 1034.33,1266.89 1036.52,1266.89 1044.25,1259.16 1044.25,1245.51 1078.4,1211.36 U13.B3@1090.21,1211.36
SLOW_SWS_SEND: D7.1 J10.1 R59.1 U2.4 | length 586.3
  Bottom Layer w5.77: 1883.33,1191.67 ccw(c1887.39,1195.77) 1883.93,1191.15
  Bottom Layer w7.87: J10.1@1780,1295 1780,1239.68 1808.9,1210.79 1812.64,1210.79 1815,1208.43 D7.1@1815,1204.68 R59.1@1850,1204.68 1870.32,1204.68 1883.31,1191.69 ; 1883.93,1191.15 1917.56,1191.15 1940.55,1191.15 1976.34,1155.36 1994.64,1155.36 2041.78,1108.22 U2.4@2254.33,1108.22
SMD_ANT: C47.2 L3.1 U12.18 | length 89
  Bottom Layer w13.64: C47.2@308.11,565 C47.2@310,563.11
  Bottom Layer w34.26: L3.1@285,563.11 C47.2@310,563.11 357.42,563.11 U12.18@367.22,572.92
SMD_PB13: U12.0
SMD_RF_BUSY: TP14.1 U12.27
SMD_RF_NRST: TP15.1 U12.28
SMD_SCL: TP17.1 U12.33
SMD_SDA: TP16.1 U12.34
SPI_CLK: J6.9 O2.2 U2.32 | length 1667.1
  Top Layer w5.91: O2.2@1200,1150.5 1202.67,1150.5 1212.72,1160.55 1212.72,1168.9 v3(1257.01,1213.19) J6.9@1257.01,1239.88 ; J6.9@1251.14,1234.02 J6.9@1257.01,1239.88 ; v3(1885,1200) 1885,1180 1917.56,1147.44 1956.23,1108.77 2135.18,1108.77 2205.39,1038.56 2205.39,1013.57 2205.39,990.8 2295.41,900.78 2403.86,900.78 2446.26,943.17 2446.26,976.08 2454.58,984.4 2454.58,991.53 v21(2502.36,1039.32) ; J6.9@1257.01,1239.88 1258.03,1240.91 J6.9@1258.03,1245 1257.01,1243.98 J6.9@1257.01,1239.88
  Int3 (Sign) w5.91: v3(1257.01,1213.19) 1257.01,1197.99 1290,1165 1478.14,1165 1503.14,1190 1874.77,1190 1884.77,1200 v3(1885,1200)
SPI_MISO: J6.8 O4.2 U2.33 | length 1709.4
  Top Layer w5.91: v3(1900,1245) 1935,1245 2023,1157 2190.91,1157 2276.09,1071.82 2276.09,977.31 2324.71,928.69 2394.11,928.69 2414.45,949.03 2414.45,992.65 2422.76,1000.96 2422.76,1007.81 2430,1015.04 2430,1030 2464.91,1064.91 v21(2489.57,1064.91)
  Top Layer w7.87: O4.2@1265,1150.5 1265,1174.21 1288.5,1197.71 v3(1288.5,1213.19) ; v3@1289.53,1209.62 J6.8@1289.53,1245
  Int3 (Sign) w5.91: v3(1288.5,1213.19) 1288.5,1243.5 1380,1335 1477.51,1335 1584.34,1228.17 1861.22,1228.17 1869.79,1236.73 1891.62,1236.73 1899.89,1245 v3(1900,1245)
SPI_MOSI: J6.7 O3.2 U2.34 | length 1561.7
  Top Layer w5.91: v3(1925,1210) 1926.68,1208.32 1926.68,1193.27 1989.26,1130.7 2151.81,1130.7 2233.94,1048.57 2233.94,1013.57 2233.94,991.7 2311.12,914.52 2398.92,914.52 2430.35,945.95 2430.35,982.67 2438.67,990.98 2438.67,1001.22 v21(2476.77,1039.32)
  Top Layer w7.87: J6.7@1321.02,1245 1321.02,1213.19 1321.02,1159.56 1330.09,1150.5 O3.2@1335,1150.5
  Int3 (Sign) w5.91: v3(1320,1213.19) 1376.79,1269.98 1480.02,1269.98 1540.91,1209.09 1864.64,1209.09 1876.37,1220.83 1893.63,1220.83 1904.45,1210 v3(1925,1210)
SPI_NSS: J6.10 O1.2 U2.2 | length 1247.8
  Top Layer w5.91: v3(1225.51,1213.19) 1225.51,1243.98 J6.10@1226.54,1245
  Int3 (Sign) w5.91: v3(1225.51,1213.19) 1225.51,1189.49 1292.29,1122.71 1343.94,1071.06 1638.32,1071.06 1702.25,1135 1917.56,1135 1936.53,1135 1977.15,1094.39 v9(1995.82,1094.39)
  Bottom Layer w7.87: O1.2@1955.5,1075 1976.44,1075 v9(1995.82,1094.39) ; v9@1995.73,1094.39 1996.84,1095.5 2004.9,1087.44 2005.75,1087.44 2030.39,1062.8 2133.56,1062.8 2153.39,1082.63 U2.2@2254.33,1082.63
SPV+: C56.1 D5.2 J15.1 | length 307.5
  Top Layer w19.68: D5.2@2025,279.72 2025,185 J15.1@2115,95
  Bottom Layer w15.75: J15.1@2115,95 2128.61,81.39 2128.61,43.2 2143.28,28.53 2146.23,28.53 2147.22,27.55 C56.1@2147.22,24.6
SPV-: C56.2 FB5.1 J15.2 | length 164.6
  Bottom Layer w19.68: C56.2@2184.62,26.56 2184.62,52.34 J15.2@2215,82.73 ; FB5.1@2198.43,184.02 2198.43,126.49 2215,109.91 J15.2@2215,95
STAT_LED: R13.2 U1.5 | length 950.5
  Top Layer w7.87: R13.2@1510,871.65 1511.65,870 1548.61,870 1567.69,850.92 v3(1567.69,848.79) ; U1.5@1929.53,546.34 1929.53,554.21 1931.5,556.18 1936.73,556.18 v3(1980.22,599.67)
  Int3 (Sign) w10: v3(1567.69,848.79) 1567.69,847.35 1512.32,791.97 1512.32,635.85 1540.89,607.28 1695.88,607.28 1727.1,576.06 1851.06,576.06 1930,655 1960,655 1980.22,634.78 v3(1980.22,599.67)
SWDCLK: J1.4 U2.30 | length 123.2
  Bottom Layer w7.87: U2.30@2545.67,1082.63 2613.49,1082.63 2639.69,1108.82 2651.72,1108.82 J1.4@2656.14,1113.24
SWDIO: J1.2 U2.28 | length 133.3
  Bottom Layer w7.87: U2.28@2545.67,1108.22 2596.59,1108.22 2651.62,1163.24 J1.2@2656.14,1163.24
SWS: C3.2 O6.2 U2.40 | length 827.1
  Top Layer w7.87: O6.2@1785.5,1185 1820.49,1185 1917.56,1087.94 1926,1079.49 2094.4,1079.49 2160.32,1013.57 2175.36,998.54 2175.36,954.64 2200,930 v17(2220,930)
  Bottom Layer w3.94: 2288.57,930 2334.51,975.95 2377.56,975.95 2377.64,976.02 C3.2@2400,976.02
  Bottom Layer w7.87: v17@2221.12,930 2288.57,930 ; C3.2@2400,976.02 U2.40@2400,1039.32
SWS_IN: D8.1 J10.2 O6.1 O8.1 R60.1 | length 318.6
  Top Layer w7.87: J10.2@1680,1295 1685.5,1289.5 O8.1@1685.5,1192.18 ; O8.1@1685.5,1185 O8.1@1685.5,1190.66 ; O6.1@1744.5,1185 1737.32,1192.18 O8.1@1685.5,1192.18 ; O8.1@1685.5,1190.66 O8.1@1685.5,1192.18 ; O8.1@1685.5,1190.66 1683.97,1192.18 O8.1@1685.5,1192.18
  Bottom Layer w7.87: R60.1@1581.77,1325 1584.68,1322.09 D8.1@1584.68,1285 1618.92,1285 1626.28,1292.36 1677.36,1292.36 J10.2@1680,1295
USB_D_N: U2.10 U6.6 | length 117.7
  Top Layer w4.4: U6.6@2322.24,1131.02 2331.85,1140.63 2331.85,1152.48 2354.09,1174.73 2354.09,1180.94 2350.03,1185 ; v23(2323.23,1177.12) 2316.98,1183.37 2316.98,1187.01 2319.96,1190 2345,1190 2350,1185
USB_D_P: U2.8 U6.4 | length 152.2
  Top Layer w4.4: v23(2297.64,1177.12) 2297.64,1182.96 2314.07,1199.39 2348.89,1199.39 2353.89,1194.39 2364.33,1183.98 2364.33,1175.53 2379.01,1160.86 2397.04,1142.83 U6.4@2397.04,1131.02
USB_L_N: L1.3 U6.1 | length 73.5
  Top Layer w4.4: U6.1@2322.24,1032.59 2331.85,1022.98 2331.85,1013.57 2331.85,1008.15 2340,1000 L1.3@2340,966.46
USB_L_P: L1.2 U6.3 | length 73.7
  Top Layer w4.4: L1.2@2379.37,979.18 2379.37,999.37 2387.43,1007.43 2387.43,1013.57 2387.43,1022.98 U6.3@2397.04,1032.59
  Top Layer w5.77: L1.2@2379.37,966.46 2380,967.09 L1.2@2380,979.18
USB_N: J4.A7 J4.B7 L1.4 | length 264.4
  Top Layer w4.4: L1.4@2340,860.16 2340,850.31 2349.61,840.7 2352.12,840.7 2354.7,838.13 2354.7,812.02 2367.49,799.23 2460.73,799.23 2465.04,794.92 2470.87,794.92 J4.A7@2489.88,794.92 ; J4.A7@2470.87,792.73 2470.87,792.64 2469.44,791.22 2469.35,791.22 2466.44,788.3 2464.28,788.3 2460.08,784.11 2460.08,766.36 2467.19,759.26 2486.18,759.26 J4.B7@2489.88,755.55
USB_P: J4.A6 J4.B6 L1.1 | length 293.3
  Top Layer w4.4: L1.1@2379.37,860.16 2379.37,850.31 2369.76,840.7 2366.67,840.7 2364.09,838.13 2364.09,815.91 2370,810 2460.44,810 2465.04,814.61 J4.B6@2489.88,814.61 ; 2464.75,814.32 J4.B6@2489.59,814.32 ; J4.A6@2489.88,775.24 2493.59,778.94 2512.57,778.94 2519.68,786.05 2519.68,803.79 2512.57,810.9 2493.59,810.9 J4.B6@2490.17,814.32
VADC_EN: R57.2 U2.3 U4.2 | length 1250.2
  Top Layer w7.87: U4.2@1435,404.68 1449.68,404.68 1475,430 1475,469.6 R57.2@1475,473.23 1478.63,469.6 1502.57,469.6 1522.44,489.47 1522.44,529.75 1551.18,558.49 1563.49,558.49 v8(1565,560)
  Int2 (Sign) w5.91: 2210,1085 2220.42,1095.42 v15(2279.92,1095.42)
  Int2 (Sign) w7.87: v8(1565,560) 1565,561.73 1668.27,665 1683.26,665 1769.33,751.07 1769.33,864.12 1855.49,950.27 1995.27,950.27 2130,1085 2210,1085
VBAT: C1.1 C19.2 C20.1 C21.1 C22.1 C41.1 C48.1 J5.2 J6.3 O9.1 O11.3 Q2.2 Q3.2 R4.1 R8.2 R9.2 R55.2 R66.2 SW1.1 U10.A2 U13.A2 | length 1216.7
  Top Layer w11.81: C1.1@316.89,159.31 316.59,159.31 310.98,153.7 310.98,153.41 292.53,134.95 v4(292.53,66.41) 293.28,65.65 293.28,50.19 305.87,37.6 SW1.1@449.21,37.6
  Top Layer w15.75: O9.1@1792.63,928.48 1821.99,899.11 R9.2@1852.92,899.11 ; R8.2@1915.75,790 1957.03,790 v4(1962.03,785)
  Top Layer w19.68: v4(670.52,38.21) Q3.2@707.4,38.21 ; J6.3@1447.01,1245 1447.01,1204.06 1450,1201.07 v4(1450,1200)
  Top Layer w27.56: C19.2@1725,310.67 1739.76,310.67 1747.05,303.39 1747.05,287.26 1747.07,259.56 ; v4@1747.31,158.61 v4@1747.31,184.65 ; 1747.31,259.56 1747.31,233.24 1747.58,232.97 v4(1747.58,221.84) 1747.58,200.76 1747.58,184.91 v4@1747.31,184.65 ; v4(1747.43,179.69) 1747.43,184.53 v4@1747.31,184.65 ; 1752.92,259.56 1790,259.56 1830,259.56 1869.56,259.56 C22.1@1875,265 1875,215 1953.97,136.03 1953.97,106.03 J5.2@1960,100
  Bottom Layer w9.84: R4.1@2322.84,527.09 2327.68,522.24 2327.68,471.38 Q2.2@2328.98,470.08 ; Q2.2@2328.98,465.39 2328.98,454.57 2349.62,433.92 2349.62,430.38 v22(2350,430)
  Bottom Layer w15.75: R66.2@1030,1298.39 1030,1297.99 1030.39,1297.6 1094.84,1297.6 C48.1@1097.44,1295 ; O11.3@1351,215 1351,208.31 1356.13,203.19 1365.98,203.19 v22(1370.22,198.94) v22(1400,198.94)
  other v4: 1747.36,158.61 1747.5,200.76 1962.03,753.42 1962.03,769.21 1962.03,800.79 1787.92,971.79 1809.65,971.79 1788.08,994.03 1809.65,993.53 1450.56,1216.88
  other v22: 1385.01,198.86
VBAT_SENSE: O5.1 O7.1 R5.2 R6.2 | length 367.7
  Bottom Layer w7.87: O5.1@2110.68,262.09 2110.68,329.33 2137.61,356.27 2173.9,356.27 R6.2@2176.18,358.54 2216.46,358.54 2275,300 O7.1@2275,282.19 ; O7.1@2271.73,257.09 2290.59,238.23 R5.2@2345.87,238.23
VBUS: C17.2 C18.2 J4.A4_B9 J4.B4_A9 Q5.A1 R35.1 R52.2 U2.12 U6.5 U7.G4 | length 454.7
  Top Layer w15.75: v2(2359.68,1142.42) 2359.68,1140.32 U6.5@2360,1140 ; J4.A4_B9@2488.58,689.29 J4.A4_B9@2489.88,690.59
  Top Layer w19.68: R52.2@2061.65,690 2062.48,690.83 R35.1@2144.17,690.83 ; R35.1@2145,691.65 R35.1@2144.17,690.83 ; v4(2150,715) 2146.97,711.97 2146.97,693.62 R35.1@2144.17,690.83 ; 2304.99,724.87 2305.11,725 v4(2376.53,725) ; v4@2376.56,725.03 v4(2396.48,725) ; v4@2395.74,761.94 2395.74,743.47 v4(2396.48,743.47) v4@2396.48,726.11 ; v4(2396.48,725) 2398.49,727.01 C18.2@2425,727.01 C17.2@2425,687.99 ; C17.2@2426.3,689.29 J4.A4_B9@2488.58,689.29 ; J4.B4_A9@2489.88,879.57 2491.85,881.53 2517.41,881.53 v4(2517.98,882.1) 2530.75,882.1 v4(2535,877.84) v4@2535,907.37 ; J4.A4_B9@2491.29,691.13 J4.A4_B9@2493.79,688.62
  other v2: 2360,1120
  other v4: 2252.91,561.33 2267.54,561.33 2252.91,575.95 2267.54,575.95 2165.94,715.39 2150.75,730.47 2166.94,730.25 2396.48,761.94 2535,893.92 2535,910
  other v29: 2348.82,1177.12
VCC_SEL: R9.1 U2.52 U10.B3 | length 1425.4
  Top Layer w5.91: R9.1@1884.42,899.11 1885.1,899.8 1918.24,899.8 v3(1919.66,898.38) 1929.09,907.81 U10.B3@1947.3,907.81
  Int2 (Sign) w3.94: v15@2413.71,1095.42 2430.61,1078.53 2430.61,1039.48
  Int2 (Sign) w5.91: v10(1809.53,644.66) 1831.3,666.44 2234.72,666.44 2326.65,758.36 2326.65,776.65 2415,865 2415,1013.57 2415,1023.88 2430.61,1039.48 ; v15(2412.79,1095.42) v15@2413.71,1095.42
  Int3 (Sign) w5.91: v10(1809.53,644.66) 1809.53,675.71 1759.17,726.06 1759.17,796.37 1759.17,813.63 1759.17,834.17 1786.12,861.12 1896.12,861.12 1919.66,884.66 v3(1919.66,898.38)
"VOUT_TPS63901 3V3&2V32": C50.1 U12.7 U12.8 U13.C2 U13.D2
VPA_EN: R67.2 U12.9 U13.A3 | length 360.8
  Int2 (Sign) w7.87: v11(835,1155) 930.31,1250.31 v11(1077.07,1250.31)
  Bottom Layer w7.87: R67.2@793.01,1171.15 809.17,1155 v11(835,1155) ; v11(1077.07,1250.31) 1077.83,1249.56 1077.83,1246.77 1077.89,1246.7 1077.89,1237.46 U13.A3@1090.21,1225.14